# EAGLE board powersensor (EAGLE 7.7.0)
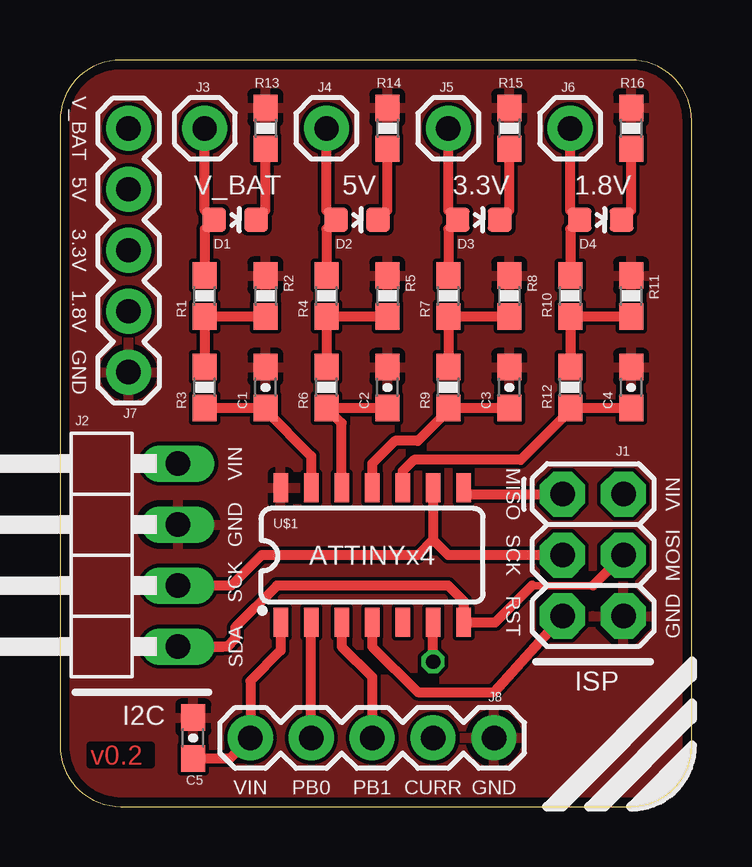
[diagram p0: board, top side]
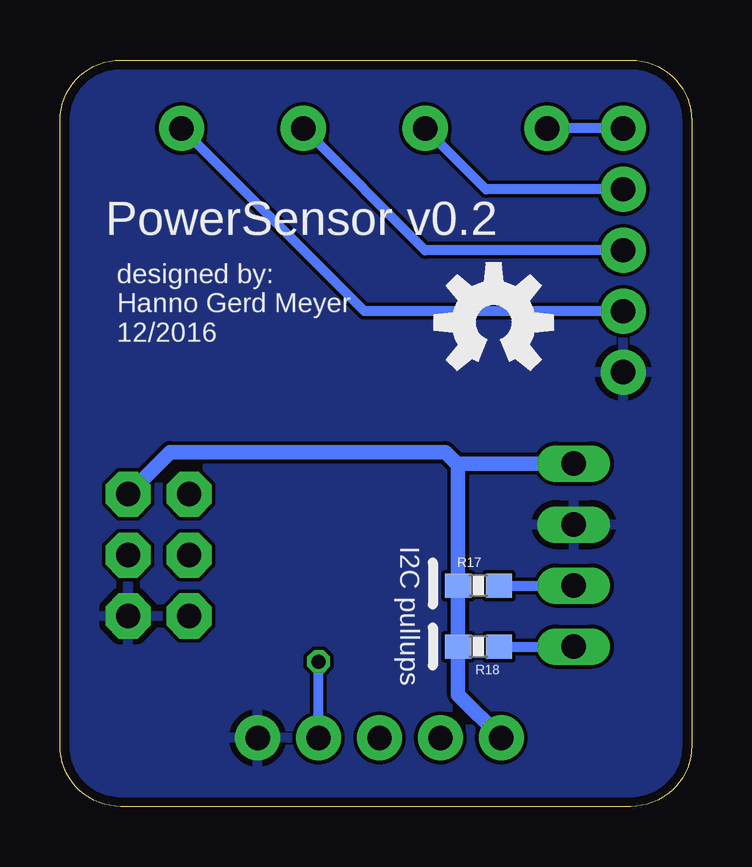
[diagram p1: board, bottom side, seen from below]

Size 26.34 x 31.11 mm. Coordinates in mm from the lower left corner, seen from the top.
Outline: 23.8,31.11 2.54,31.11 arc90 0,28.57 0,2.54 arc90 2.54,0 23.8,0 arc90 26.34,2.54 26.34,28.57 arc90 23.8,31.11
Copper layers (1*16): Top 0.0356mm / dielectric 1.5011mm / Bottom 0.0356mm
Design rules "oshpark-2layer": minimum track width 6mil, minimum drill 13mil, track to track 6mil, track to pad 6mil, pad to pad 6mil, via to via 6mil, smd to smd 6mil, copper to edge 15mil, drill to drill 6mil, minimum pad ring 7mil, minimum via ring 7mil, stop-mask expansion 2.5mil, vias tented up to drill 0mil, thermal gap 10mil

## Footprints (pad centres in the part's own frame; a part is rotated, then mirrored left to right if it is on the bottom)
0603-CAP = smd 1.1 x 1: 1 -0.85,0; 2 0.85,0
LED-0603 = smd 1 x 1: A 0,-0.877; C 0,0.877
2X3 = drill 1.016 pad 1.88 octagon: 1 0,0; 2 0,2.54; 3 2.54,0; 4 2.54,2.54; 5 5.08,0; 6 5.08,2.54
1X04/90 = drill 1.016 long: 1 -3.81,-3.81; 2 -1.27,-3.81; 3 1.27,-3.81; 4 3.81,-3.81
1X01 = drill 1.016 pad 1.88: 1 0,0
1X05 = drill 1.016 pad 1.88: 1 0,0; 2 2.54,0; 3 5.08,0; 4 7.62,0; 5 10.16,0
0603-RES = smd 1.1 x 1: 1 -0.85,0; 2 0.85,0
SO14 = smd 0.6 x 1.2: 1 -3.81,-2.8; 2 -2.54,-2.8; 3 -1.27,-2.8; 4 0,-2.8; 5 1.27,-2.8; 6 2.54,-2.8; 7 3.81,-2.8; 8 3.81,2.8; 9 2.54,2.8; 10 1.27,2.8; 11 0,2.8; 12 -1.27,2.8; 13 -2.54,2.8; 14 -3.81,2.8

## Placement (x,y rotation side)
C1  10u  [0603-CAP]  8.57,17.46 90 top
C2  10u  [0603-CAP]  13.65,17.46 90 top
C3  10u  [0603-CAP]  18.73,17.46 90 top
C4  10u  [0603-CAP]  23.81,17.46 90 top
C5  100nF  [0603-CAP]  5.56,2.86 90 top
D1  V_BAT  [LED-0603]  7.3,24.45 270 top
D2  5V  [LED-0603]  12.38,24.45 270 top
D3  3.3V  [LED-0603]  17.46,24.45 270 top
D4  1.8V  [LED-0603]  22.54,24.45 270 top
J1  ISP  [2X3]  20.95,13.02 270 top
J2  I2C  [1X04/90]  1.11,10.48 90 top
J3  [1X01]  6.03,28.26 90 top
J4  [1X01]  11.11,28.26 90 top
J5  [1X01]  16.19,28.26 90 top
J6  [1X01]  21.27,28.26 270 top
J7  [1X05]  2.86,18.1 90 top
J8  [1X05]  18.1,2.86 180 top
R1  13k  [0603-RES]  6.03,21.27 90 top
R2  1k1  [0603-RES]  8.57,21.27 270 top
R3  750R  [0603-RES]  6.03,17.46 90 top
R4  4k7  [0603-RES]  11.11,21.27 90 top
R5  1k1  [0603-RES]  13.65,21.27 270 top
R6  750R  [0603-RES]  11.11,17.46 90 top
R7  2k7  [0603-RES]  16.19,21.27 90 top
R8  1k1  [0603-RES]  18.73,21.27 270 top
R9  750R  [0603-RES]  16.19,17.46 90 top
R10  1k1  [0603-RES]  21.27,21.27 90 top
R11  1k1  [0603-RES]  23.81,21.27 270 top
R12  750R  [0603-RES]  21.27,17.46 90 top
R13  560R  [0603-RES]  8.57,28.26 270 top
R14  180R  [0603-RES]  13.65,28.26 270 top
R15  82R  [0603-RES]  18.73,28.26 270 top
R16  0R  [0603-RES]  23.81,28.26 270 top
R17  4k7  [0603-RES]  8.89,9.21 0 bottom
R18  4k7  [0603-RES]  8.89,6.67 180 bottom
U$1  ATTINYx4  [SO14]  13.02,10.48 0 top
U$3  [OSHW-LOGO-M]  8.26,20.16 0 bottom

## Library data of the parts
C1-C5 = SparkFun-Capacitors
D1-D4 = SparkFun-LED
J1 J3-J8 = SparkFun-Connectors
J2 = pinhead
R1-R18 = SparkFun-Passives
U$1 = SparkFun-DigitalIC; PROD_ID: IC-11285
U$3 = SparkFun-Aesthetics

## Nets
1.8V: D4.A J6.1 J7.2 R10.2
1.8V_ADC: C4.1 R12.1 U$1.10
3.3V: D3.A J5.1 J7.3 R7.2
3.3V_ADC: C3.1 R9.1 U$1.11
5V: D2.A J4.1 J7.4 R4.2
5V_ADC: C2.1 R6.1 U$1.12
12V_ADC: C1.1 R3.1 U$1.13
CURRENT: J8.2 U$1.6
GND: C1.2 C2.2 C3.2 C4.2 C5.2 J1.6 J2.3 J7.1 J8.1 R2.1 R5.1 R8.1 R11.1 R13.1 R14.1 R15.1 R16.1 U$1.14
MISO: J1.1 U$1.8
N$1: R1.1 R2.2 R3.2
N$2: R4.1 R5.2 R6.2
N$3: R7.1 R8.2 R9.2
N$4: R10.1 R11.2 R12.2
N$5: D1.C R13.2
N$6: D2.C R14.2
N$7: D3.C R15.2
N$8: D4.C R16.2
PB0: J8.4 U$1.2
PB1: J8.3 U$1.3
RESET: J1.5 U$1.4
SCK: J1.3 J2.2 R17.2 U$1.9
SDA/MOSI: J1.4 J2.1 R18.1 U$1.7
V_BATT: D1.A J3.1 J7.5 R1.2
VIN: C5.1 J1.2 J2.4 J8.5 R17.1 R18.2 U$1.1

## Tracks (layer width: path | path; a pad name or v marks a point on that pad's centre or on a via)
1.8V
  Top 0.406: J6.1 21.27,24.84 D4.A 21.27,24.05 R10.2
  Bottom 0.406: J7.2 13.65,20.64 J6.1
1.8V_ADC
  Top 0.406: C4.1 R12.1 21.27,16.51 19.21,14.45 14.76,14.45 14.29,13.97 U$1.10
3.3V
  Top 0.406: J5.1 16.19,24.84 D3.A 16.19,24.05 R7.2
  Bottom 0.406: J7.3 11.11,23.18 J5.1
3.3V_ADC
  Top 0.406: C3.1 R9.1 16.19,16.51 14.92,15.24 13.97,15.24 13.02,14.29 U$1.11
5V
  Top 0.406: J4.1 11.11,24.84 D2.A 11.11,24.05 R4.2
  Bottom 0.406: J7.4 8.57,25.72 J4.1
5V_ADC
  Top 0.406: C2.1 R6.1 11.75,15.98 U$1.12
12V_ADC
  Top 0.406: R3.1 C1.1 8.57,16.51 10.48,14.61 U$1.13
CURRENT  (via drill 0.6)
  Top 0.406: v15.56,6.03 U$1.6
  Bottom 0.406: J8.2 v15.56,6.03
GND
  pour Top: 23.81,0 2.54,0 arc-90 0,2.54 0,28.57 arc-90 2.54,31.11 23.81,31.11 arc-90 26.35,28.57 26.35,2.54 arc-90
  pour Bottom: 23.81,0 2.54,0 arc-90 0,2.54 0,28.57 arc-90 2.54,31.11 23.81,31.11 arc-90 26.35,28.57 26.35,2.54 arc-90
MISO
  Top 0.406: J1.1 16.83,13.02 U$1.8
N$1
  Top 0.406: R3.2 R1.1 R2.2
N$2
  Top 0.406: R5.2 R4.1 R6.2
N$3
  Top 0.406: R8.2 R7.1 R9.2
N$4
  Top 0.406: R11.2 R10.1 R12.2 21.27,18.73
N$5
  Top 0.406: D1.C 8.57,24.84 R13.2
N$6
  Top 0.406: D2.C 13.65,24.84 R14.2
N$7
  Top 0.406: D3.C 18.73,24.84 R15.2
N$8
  Top 0.406: D4.C 23.81,24.84 R16.2
PB0
  Top 0.406: J8.4 U$1.2
PB1
  Top 0.406: U$1.3 11.75,6.67 13.02,5.4 J8.3
RESET
  Top 0.406: U$1.4 13.02,6.67 14.92,4.76 18.1,4.76 J1.5
SCK
  Top 0.406: U$1.9 15.56,11.11 | 15.56,11.11 14.92,10.48 8.41,10.48 7.14,9.21 J2.2 | J1.3 16.19,10.48 15.56,11.11
  Bottom 0.406: R17.2 J2.2
SDA/MOSI
  Top 0.305: 19.68,9.21 22.23,9.21
  Top 0.406: 19.68,9.21 18.16,7.68 U$1.7 16.83,8.57 16.19,9.21 9.05,9.21 7.3,7.46 7.3,6.99 6.99,6.67 J2.1 6.83,6.67 | 22.23,9.21 J1.4
  Bottom 0.406: R18.1 J2.1
V_BATT
  Top 0.406: J3.1 6.03,24.84 D1.A 6.03,24.05 R1.2
  Bottom 0.406: J7.5 J3.1
VIN
  Top 0.406: U$1.1 9.21,6.51 7.94,5.24 J8.5 7.09,2.01 C5.1
  Bottom 0.61: J2.4 9.68,14.29 9.74,14.23 | 9.74,14.23 R17.1 R18.2 9.74,4.66 J8.5 | J1.2 21.75,14.76 10.27,14.76 9.74,14.23

## Text on the board
Top: v0.2
tNames: V_BAT | 5V | 3.3V | 1.8V | GND | VIN | MISO | VIN | GND | SCK | MOSI | SCK | RST | GND | SDA | VIN | PB0 | PB1 | CURR | GND
bNames: PowerSensor v0.2 | designed by: / Hanno Gerd Meyer / 12/2016 | I2C pullups